# Altium PCB PCB1.PcbDoc
Units mm, origin at the board's own origin, x right, y up, seen from the top; angles counter-clockwise.
Board outline 99.5 x 96.9 mm, 2 copper layers (Top Layer, Bottom Layer); 68 components, 61 nets, 277 pads, 86 vias.
Unrouted connection lines stored in the file: 2.
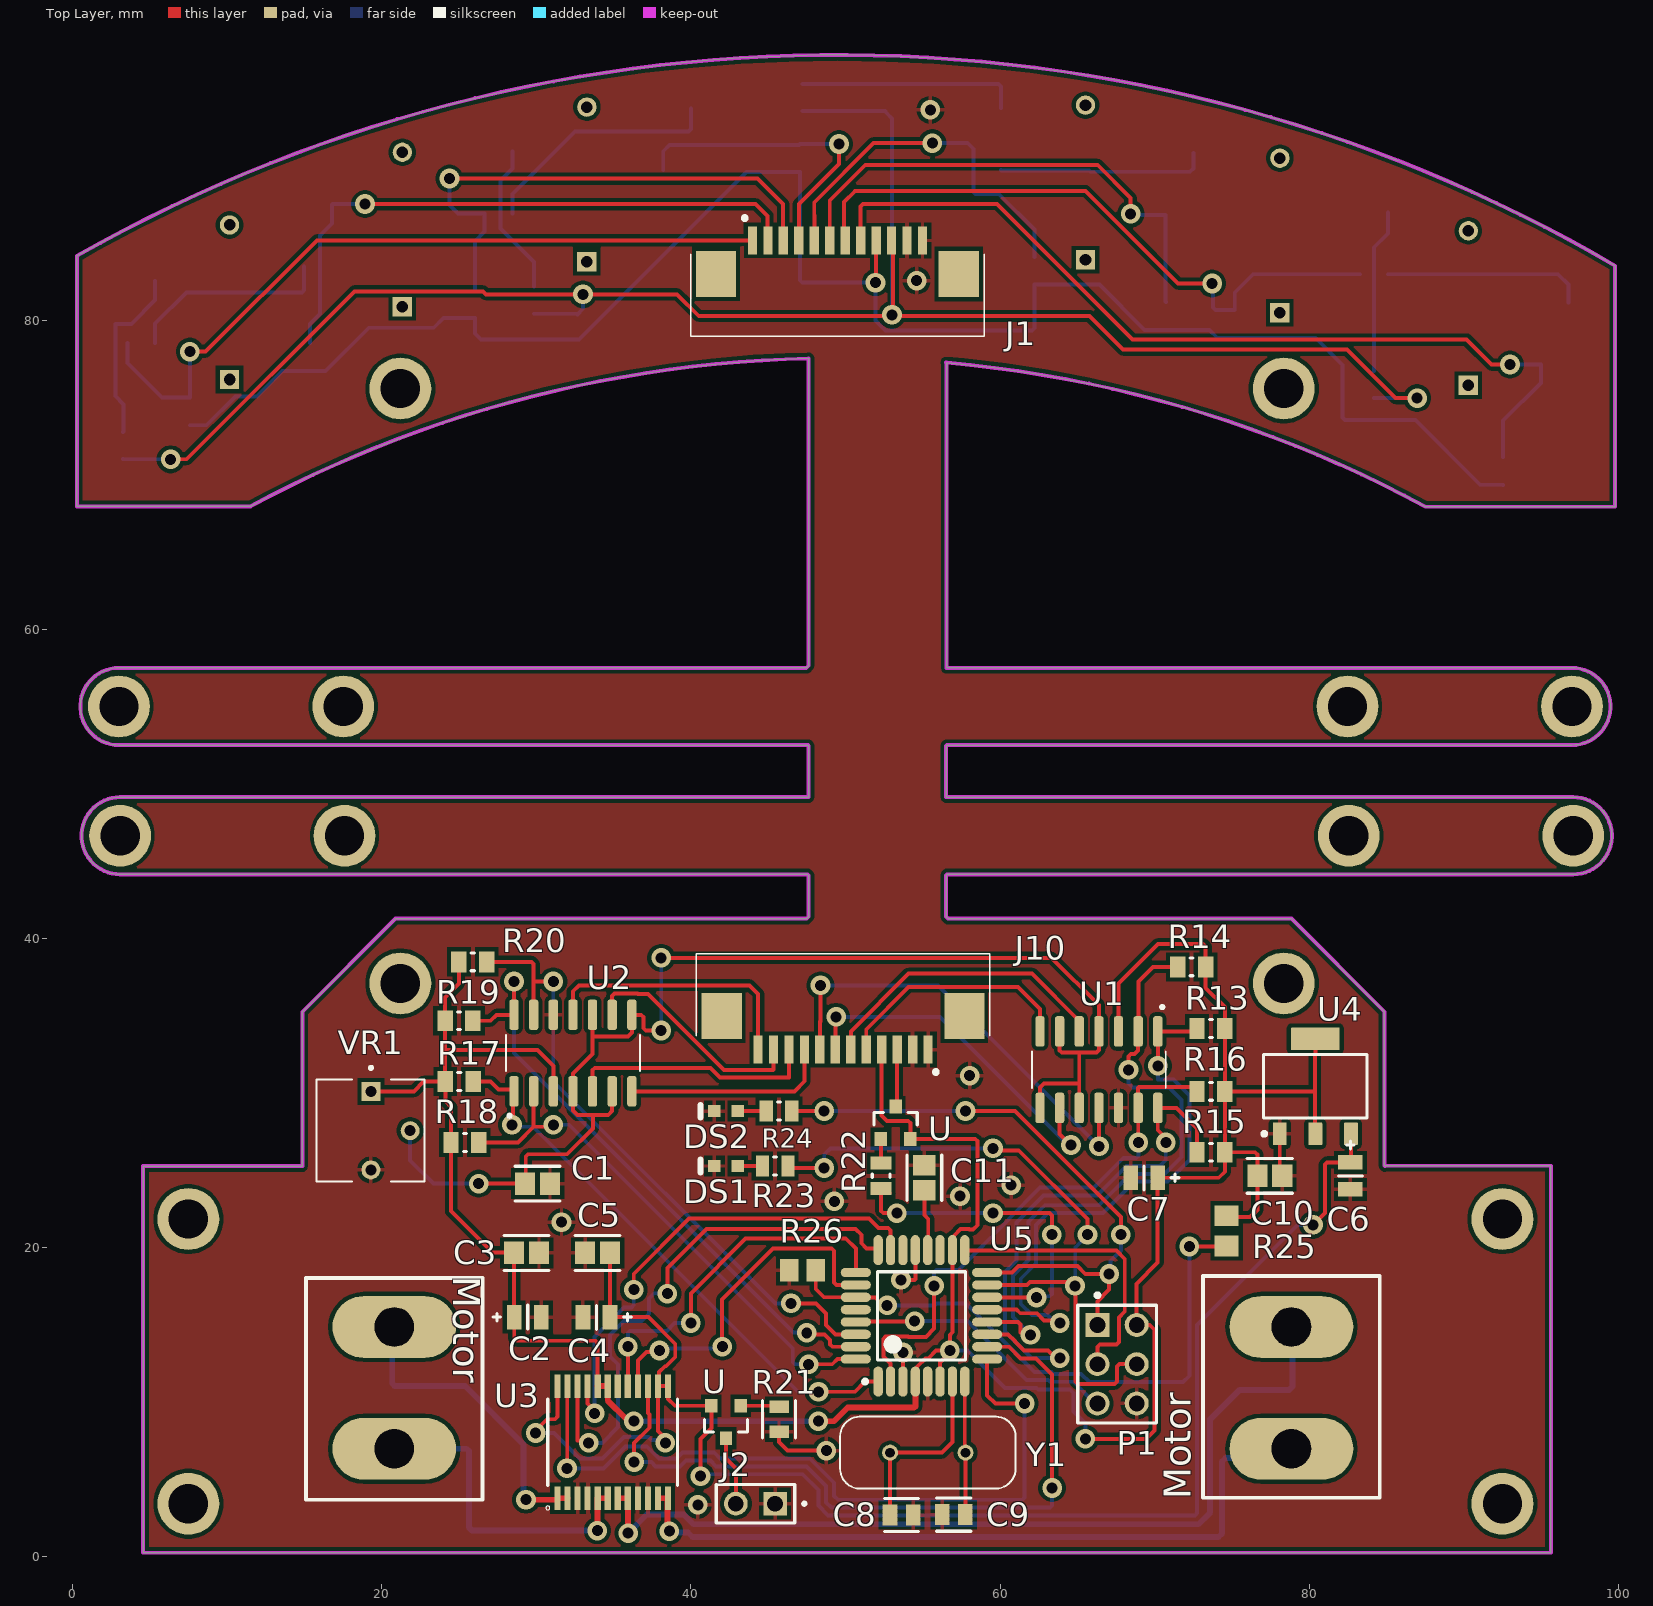
[diagram p0: Top Layer view]
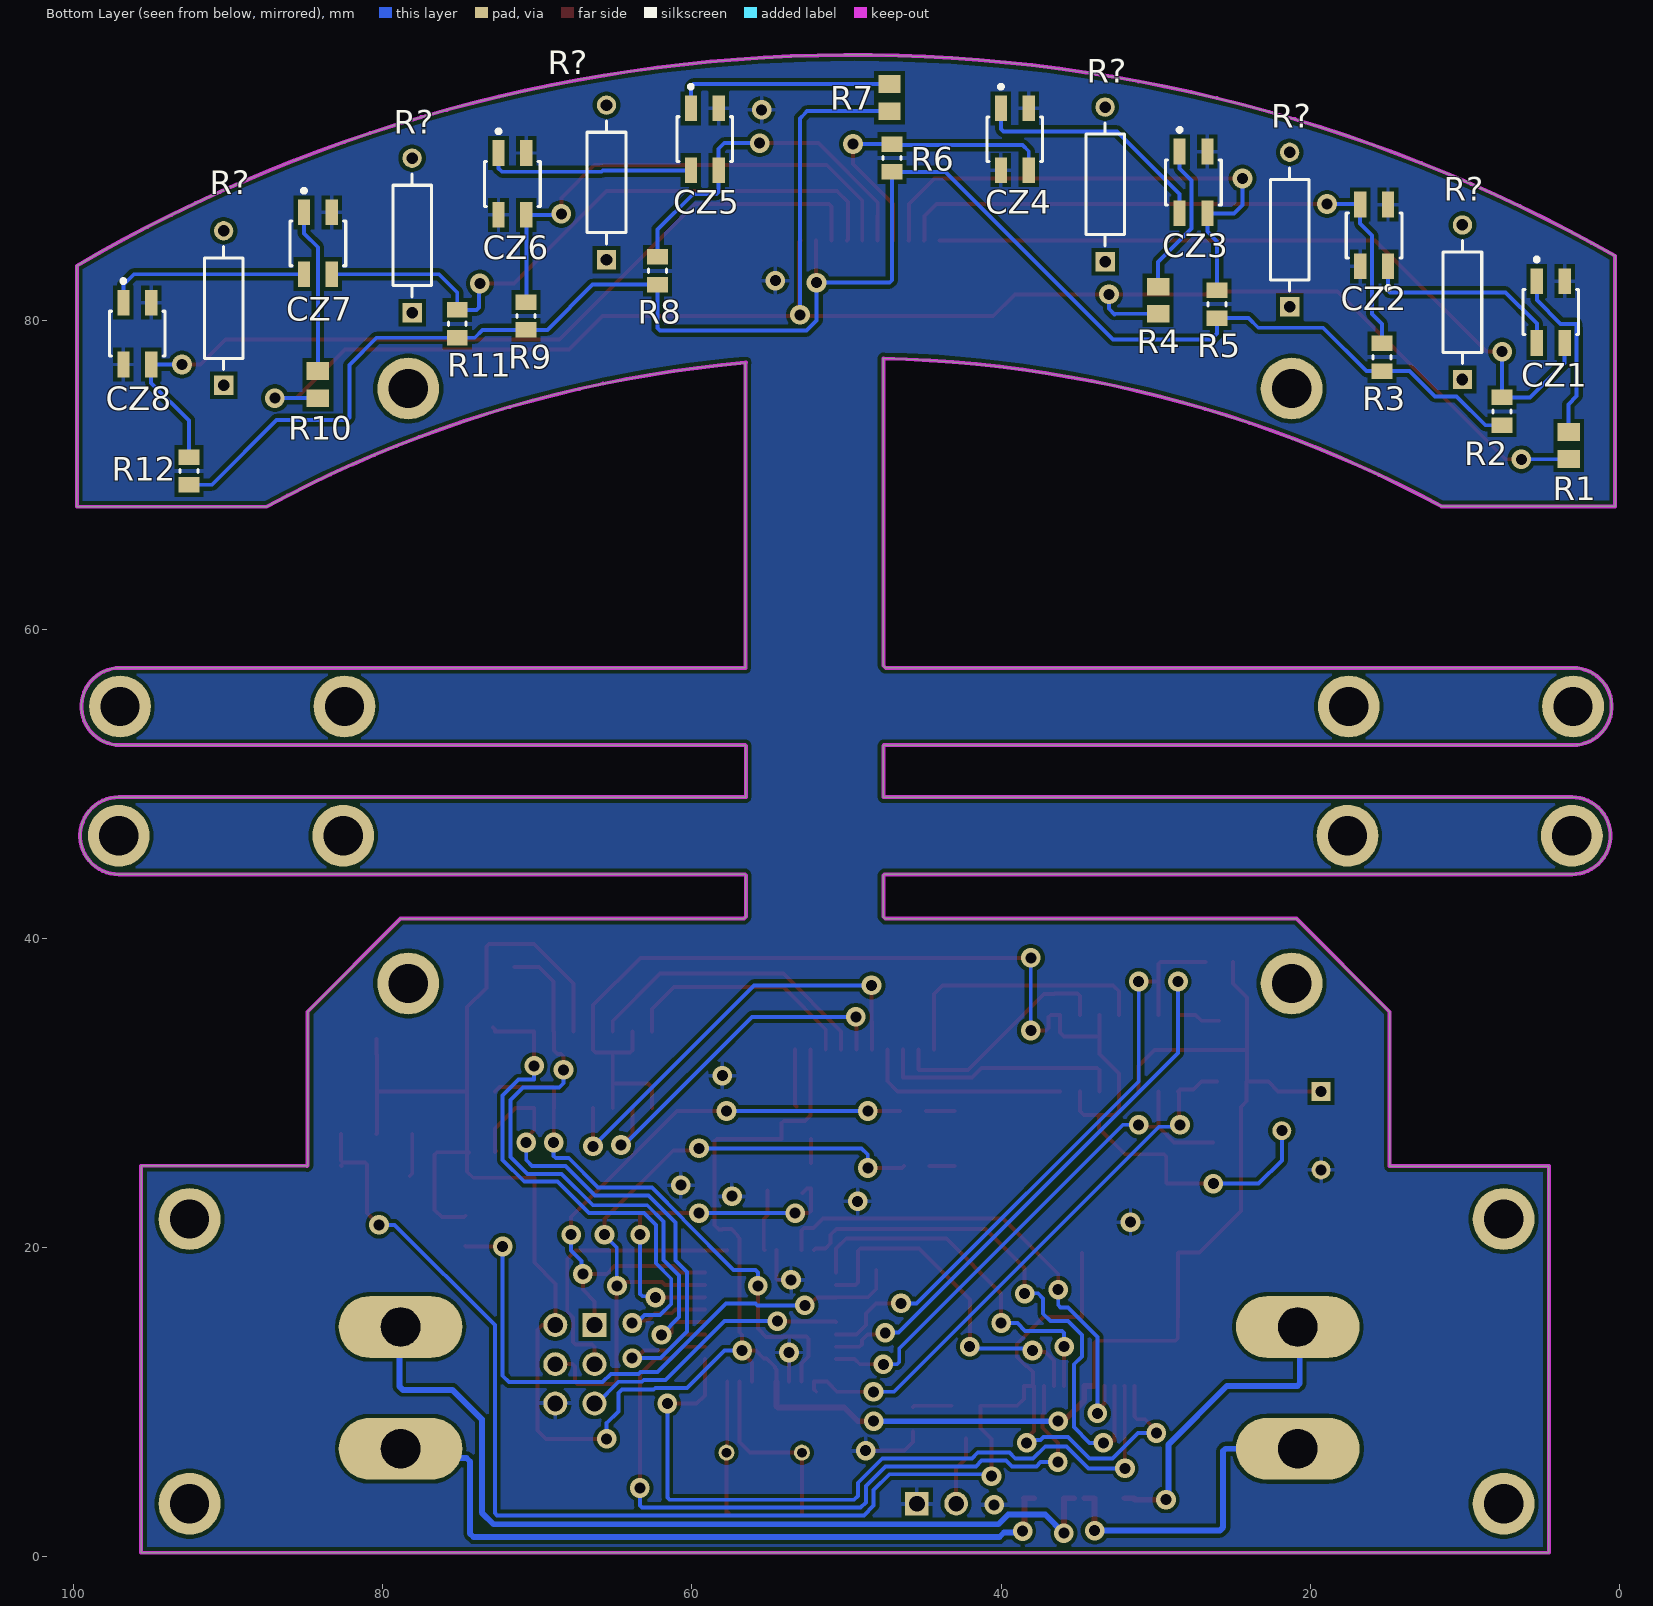
[diagram p1: Bottom Layer view, seen from below]
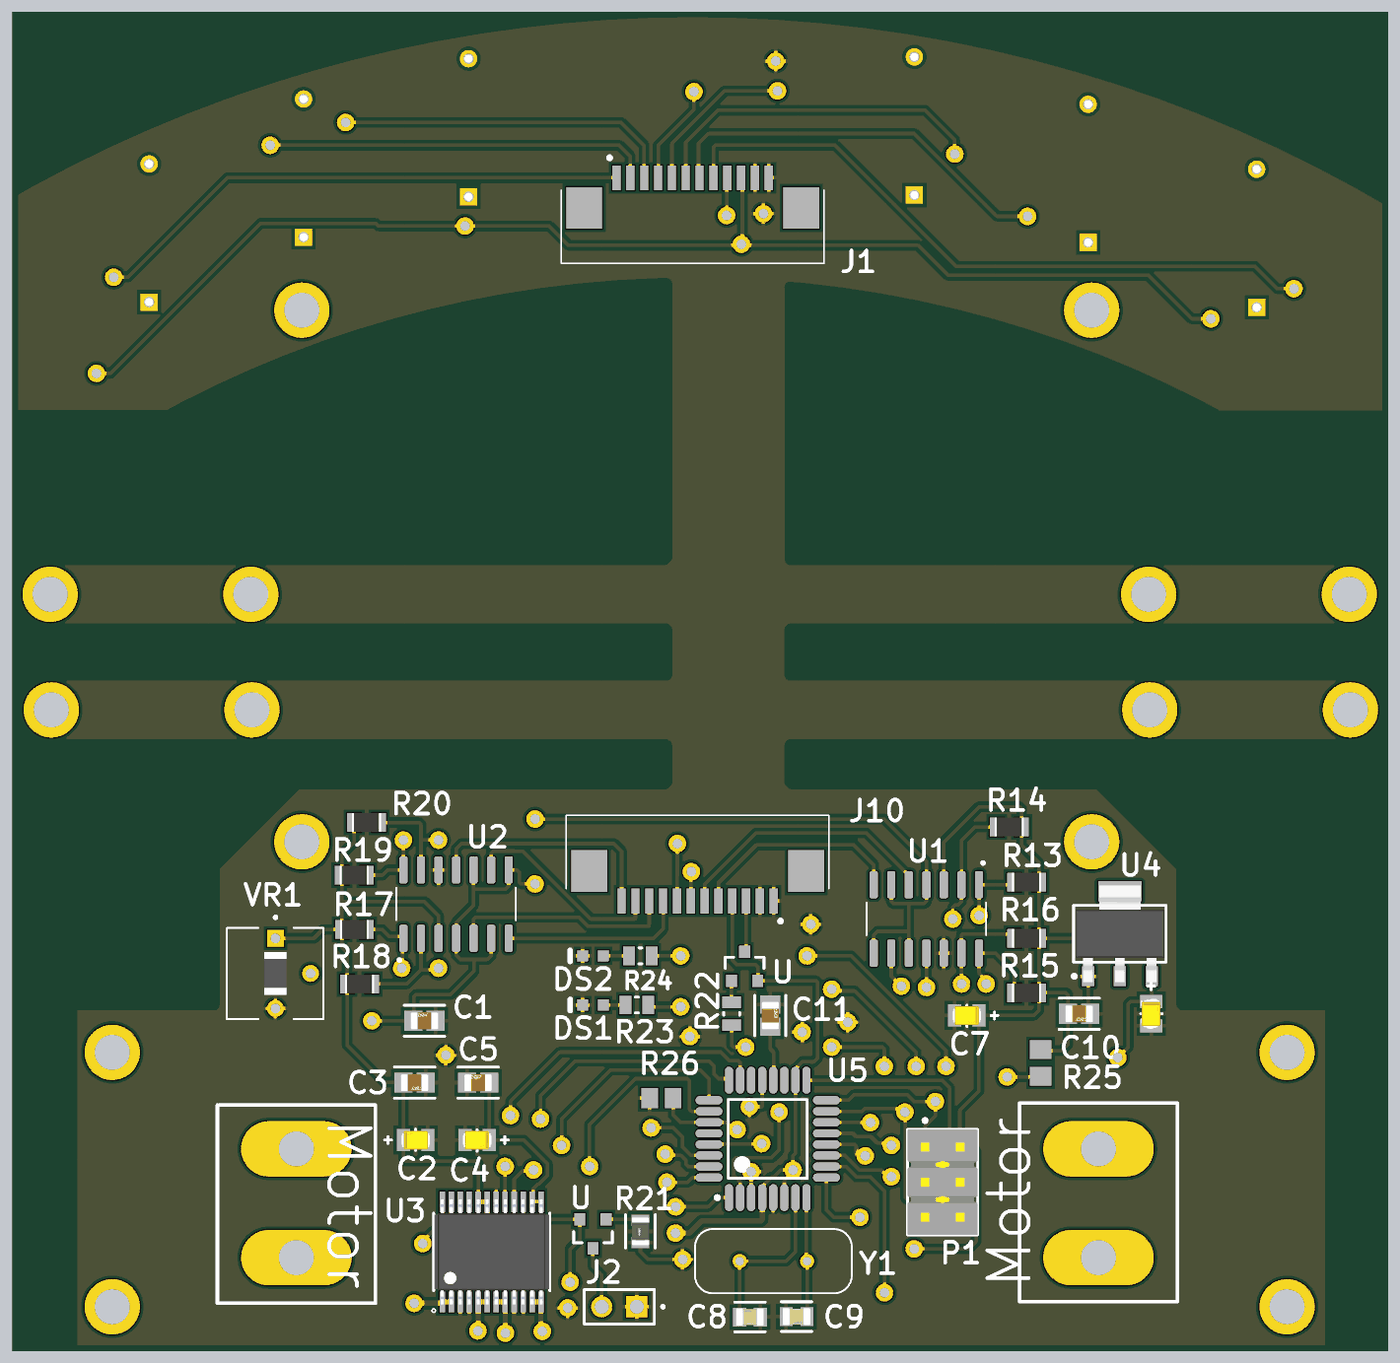
[diagram p2: 3D render of the assembled board from above, using the file's embedded part models]
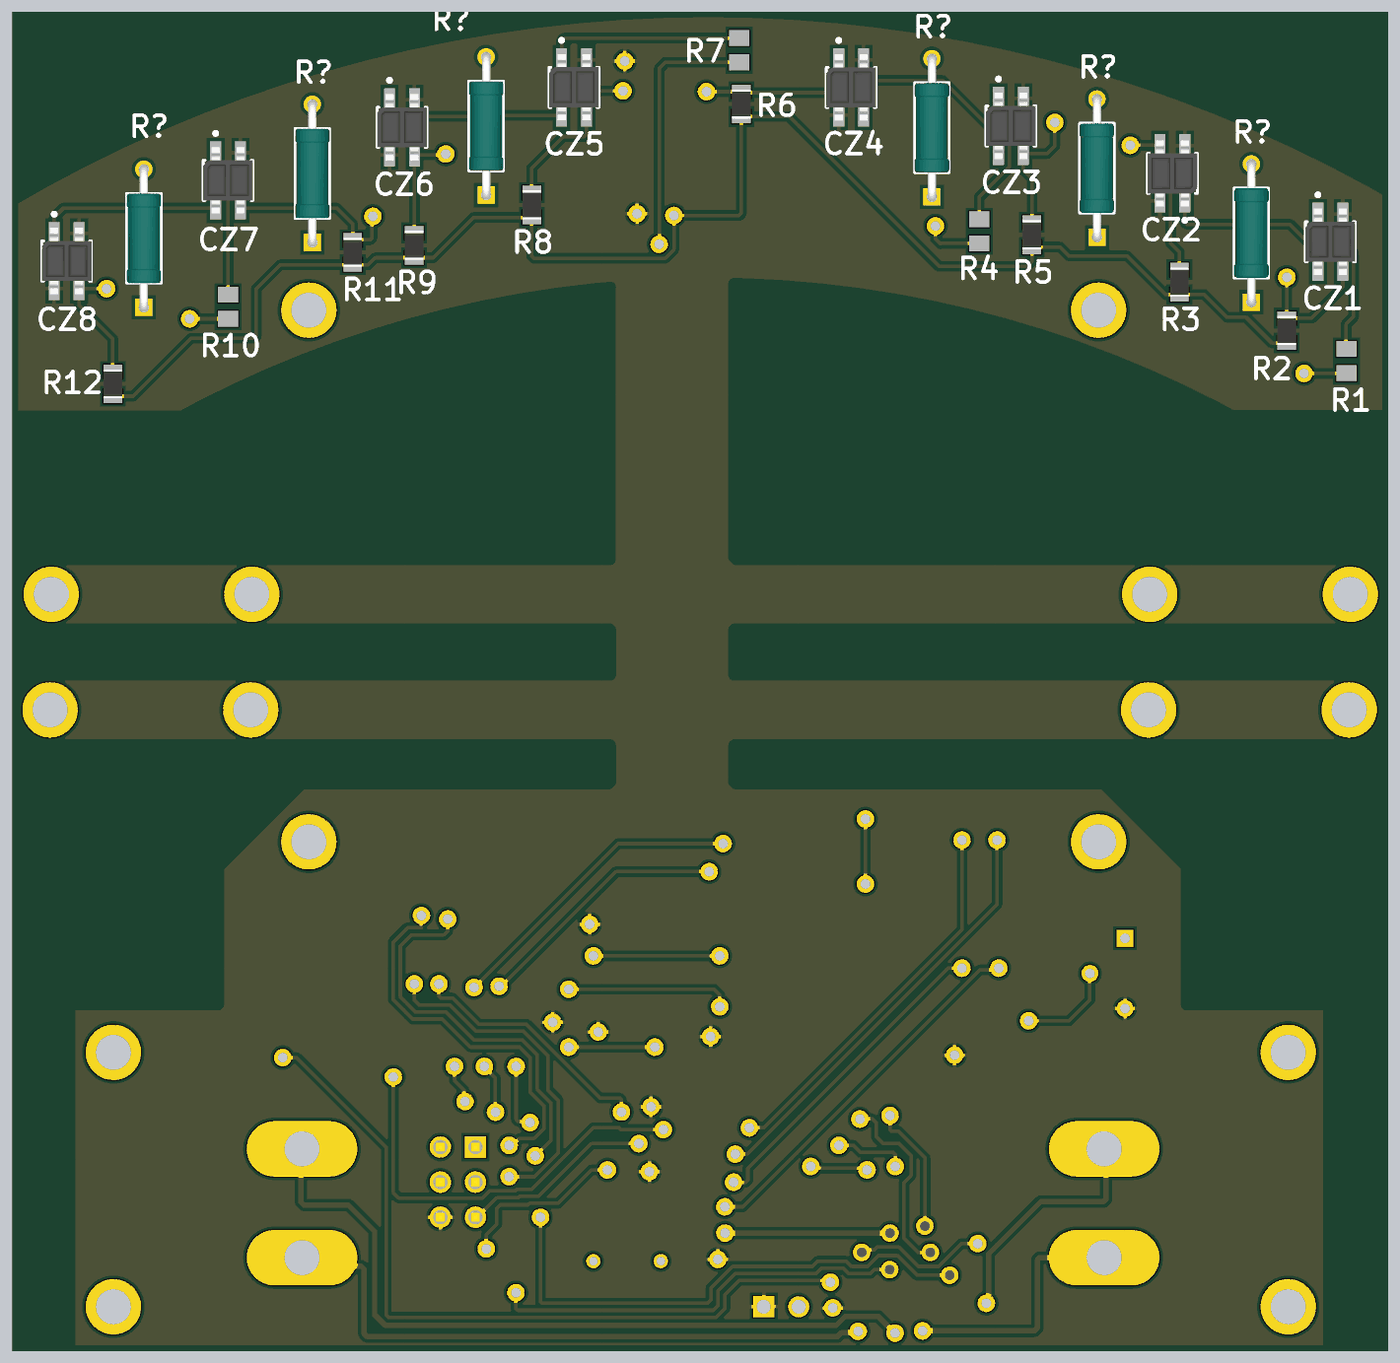
[diagram p3: 3D render of the assembled board from below, using the file's embedded part models]

## Layer stack, top to bottom
Top Solder: solder mask 0.0102, Solder Resist, Dk 3.5
Top Layer: signal copper 0.0356
Dielectric 1: dielectric 0.32, FR-4, Dk 4.8
Bottom Layer: signal copper 0.0356
Bottom Solder: solder mask 0.0102, Solder Resist, Dk 3.5

## Board outline
4.572,0.254 4.572,25.273 14.859,25.273 14.872,25.286 14.872,35.254 20.893,41.275 47.498,41.275 47.625,41.402 47.625,44.069 47.534,44.137 3.081,44.137 cw(c3.081,46.637) 3.081,49.137 47.613,49.137 47.625,49.149 47.625,52.451 47.576,52.5 3,52.5 cw(c3,55) 3,57.5 47.467,57.5 47.625,57.658 47.625,77.47 47.624,77.514 ccw(c49.486,-2.417) 11.518,67.945 0.285,67.945 0.285,84.147 cw(c49.486,-2.417) 99.79,83.511 99.79,67.92 87.538,67.92 ccw(c49.486,-2.417) 56.548,77.24 56.546,77.215 56.546,57.5 97,57.5 cw(c97,55) 97,52.5 56.564,52.5 56.515,52.451 56.515,49.149 56.527,49.137 97.081,49.137 cw(c97.081,46.637) 97.081,44.137 56.583,44.137 56.515,44.069 56.515,41.402 56.642,41.275 78.851,41.275 84.872,35.254 84.872,25.309 84.908,25.273 84.89,25.291 95.613,25.291 95.631,25.273 95.631,0.254

## Design rules (kind name [scope] priority, off if disabled: settings)
Clearance [All] p1: gap=0.254 ignorepadtopadclearanceinfootprint=FALSE except(0: Arc-Hole Track-Hole SMDPad-Hole THPad-Hole Via-Hole Fill-Hole Poly-Hole Region-Hole Text-Hole; 0.2: SMDPad-SMDPad)
HoleToHoleClearance [All] p1: gap=0.2 allowstackedmicrovias=TRUE
MinimumSolderMaskSliver [All] p1: minsoldermaskwidth=0
PolygonConnect [All] p1: connectstyle=Relief reliefconductorwidth=0.254 reliefentries=4 polygonreliefangle="90 Angle" airgapwidth=0.254
RoutingVias [All] p1: holewidth=0.711 width=1.27 viastyle="Through Hole" minholewidth=0.711 minwidth=1.27 maxholewidth=0.711 maxwidth=1.27
SilkToSilkClearance [All] p1: silktosilkclearance=0.2
SilkToSolderMaskClearance [IsPad] p1: minsilkscreentomaskgap=0.2 clearancetoexposedcopper=TRUE
SolderMaskExpansion [All] p1: expansion=0.102 istentingtop=FALSE
Width [All] p1: maxlimit=0.381 minlimit=0.254 preferedwidth=0.254
26 further rules are at their usual default settings.

## Classes and differential pairs
component class "złącze do prog": P1
component class zab.odw.polar.: J2 R21 U
component class "sterownik silników": C2 C3 C4 C5 R? U3
component class "stabilizator nap.": C6 C7 U4
component class microcontroller: C8 C9 C10 C11 DS1 DS2 R22 R23 R24 R25 R26 U U5 Y1
component class czujniki: CZ1 CZ2 CZ3 CZ4 CZ5 CZ6 CZ7 CZ8 J1 R1 R2 R3 R4 R5 R6 R7 R8 R9 R10 R11 R12 R?
component class czujniki2: C1 J10 R13 R14 R15 R16 R17 R18 R19 R20 U1 U2 VR1

## Components (designator, comment, footprint, x,y, rotation, side; value= is the part's Value field where it differs from the comment)
C1 "100n" FP-0805-L_2_01_0_2-W_1_25-IPC_B 30.084,24.13 r180 top
C2 "10u" FP-TAJP-MFG 29.449,15.494 r180 top
C3 "100n" FP-0805-L_2_01_0_2-W_1_25-IPC_B 29.372,19.654 r0 top
C4 "10u" FP-TAJP-MFG 33.894,15.494 r0 top
C5 "100n" FP-0805-L_2_01_0_2-W_1_25-IPC_B 33.966,19.654 r180 top
C6 "10u" FP-TAJP-MFG 82.662,24.638 r90 top
C7 "10u" FP-TAJP-MFG 69.327,24.511 r0 top
C8 "22n" FP-C0805C-DN-MFG 53.63,2.692 r0 top value="22,000 pF"
C9 "22n" FP-C0805C-DN-MFG 57.008,2.718 r180 top value="22,000 pF"
C10 "100n" FP-0805-L_2_01_0_2-W_1_25-IPC_B 77.455,24.638 r0 top
C11 "100n" FP-0805-L_2_01_0_2-W_1_25-IPC_B 55.103,24.511 r90 top
CZ1 "QRE1113GR" FP-100CY-MFG 4.445,80.518 r270 bottom
CZ2 "QRE1113GR" FP-100CY-MFG 15.875,85.471 r90 bottom
CZ3 "QRE1113GR" FP-100CY-MFG 27.559,88.9 r270 bottom
CZ4 "QRE1113GR" FP-100CY-MFG 39.116,91.694 r270 bottom
CZ5 "QRE1113GR" FP-100CY-MFG 59.173,91.699 r270 bottom
CZ6 "QRE1113GR" FP-100CY-MFG 71.617,88.805 r270 bottom
CZ7 "QRE1113GR" FP-100CY-MFG 84.201,84.963 r270 bottom
CZ8 "QRE1113GR" FP-100CY-MFG 95.885,79.121 r270 bottom
DS1 "HSMS-C190" AVAG-HSMX-C190_V 42.276,25.273 r180 top
DS2 "HSMG-C190" AVAG-HSMX-C190_V 42.276,28.829 r180 top
J1 "AFA07-S12FCA-00" AFA07S12FCA00 49.486,82.047 r0 top
J2 "HTSW-102-08-L-S" SAMTEC_HTSW-102-08-L-S 44.181,3.429 r0 top
J10 "AFA07-S12FCA-00" AFA07S12FCA00 49.847,35.904 r180 top
P1 "TSW-103-07-G-D" SMTC-TSW-103-07-G-D_V 67.572,12.454 r270 top
R1 "220" RESC2013X70X40NL20T20 3.277,71.882 r270 bottom
R2 "10K" RESC2013X60X35NL10T20 7.595,74.092 r270 bottom
R3 "10K" RESC2013X60X35NL10T20 15.367,77.597 r270 bottom
R4 "220" RESC2013X70X40NL20T20 29.845,81.28 r270 bottom
R5 "10K" RESC2013X60X35NL10T20 26.035,81.026 r270 bottom
R6 "10K" RESC2013X60X35NL10T20 47.066,90.486 r270 bottom
R7 "220" RESC2013X70X40NL20T20 47.223,94.386 r270 bottom
R8 "10K" RESC2013X60X35NL10T20 62.23,83.185 r270 bottom
R9 "10K" RESC2013X60X35NL10T20 70.739,80.264 r270 bottom
R10 "220" RESC2013X70X40NL20T20 84.201,75.819 r270 bottom
R11 "10K" RESC2013X60X35NL10T20 75.184,79.756 r270 bottom
R12 "10K" RESC2013X60X35NL10T20 92.541,70.232 r270 bottom
R13 "10K" RESC2013X60X35NL10T20 73.645,34.163 r0 top
R14 "10K" RESC2013X60X35NL10T20 72.397,38.154 r0 top
R15 "10K" RESC2013X60X35NL10T20 73.645,26.162 r180 top
R16 "10K" RESC2013X60X35NL10T20 73.645,30.099 r180 top
R17 "10K" RESC2013X60X35NL10T20 25.015,30.734 r180 top
R18 "10K" RESC2013X60X35NL10T20 25.385,26.797 r180 top
R19 "10K" RESC2013X60X35NL10T20 25.004,34.671 r0 top
R20 "10K" RESC2013X60X35NL10T20 25.893,38.481 r0 top
R21 "100K" FP-RC0805-0_6-IPC_C 45.705,8.89 r90 top
R22 "100" RESC2013X50X30LL20T20 52.309,24.638 r90 top
R23 "" RESC2013X50X30LL20T20 45.451,25.273 r180 top
R24 "" RESC2013X50X30LL20T20 45.705,28.829 r180 top
R25 "47K" RESC2013X70X40ML20T20 74.661,21.082 r90 top
R26 "33K" RESC2013X60X40NL20T25 47.229,18.542 r0 top
R? "MRS25000C1002FCT00" FP-MRS25-MFG 21.336,85.852 r90 bottom
R? "MRS25000C1002FCT00" FP-MRS25-MFG 33.274,88.773 r90 bottom
R? "MRS25000C1002FCT00" FP-MRS25-MFG 10.16,81.153 r90 bottom
R? "MRS25000C1002FCT00" FP-MRS25-MFG 65.532,88.9 r90 bottom
R? "MRS25000C1002FCT00" FP-MRS25-MFG 78.105,85.471 r90 bottom
R? "MRS25000C1002FCT00" FP-MRS25-MFG 90.297,80.772 r90 bottom
U "" SOT23-3 53.247,28.029 r0 top
U "" SOT23-3 42.276,8.763 r180 top
U1 "LM339D" SOIC127P600X175-14N 66.397,31.504 r270 top
U2 "LM339D" SOIC127P600X175-14N 32.372,32.579 r90 top
U3 "TB6612FNG(O,C,8,EL" SOP65P760X160-24N 34.947,7.404 r90 top
U4 "LM1117MPX-5.0/NOPB" DCY0004A_L 80.397,30.429 r90 top
U5 "ATmega328P-AU" 32A_M 54.921,15.581 r90 top
VR1 "10K" TRIM_3362P-1-103 19.304,27.559 r270 top
Y1 "16MHz" XTAL_ECS-160-20-4X 55.33,6.731 r180 top
? "Component_1" PCBComponent_1 20.813,14.859 r270 top
? "Component_1" PCBComponent_1 78.852,6.985 r90 top

## Footprints (in the part's own frame and the unit in brackets; to place one, negate y for a bottom-side part, rotate by r counter-clockwise, add the part's x,y. Pads: shape width x height; smd on the part's side, far side on the other; paste and mask are expansions set on the pad)
32A_M [mm] "Thin QFP, 32-Leads, Body 7x7mm, Pitch 0.8mm, IPC Low Density"
  oval 1.95x0.6 smd: 1(-4.25,2.8) 2(-4.25,2) 3(-4.25,1.2) 4(-4.25,0.4) 5(-4.25,-0.4) 6(-4.25,-1.2) 7(-4.25,-2) 8(-4.25,-2.8) 17(4.25,-2.8) 18(4.25,-2) 19(4.25,-1.2) 20(4.25,-0.4) 21(4.25,0.4) 22(4.25,1.2) 23(4.25,2) 24(4.25,2.8)
  oval 0.6x1.95 smd: 9(-2.8,-4.25) 10(-2,-4.25) 11(-1.2,-4.25) 12(-0.4,-4.25) 13(0.4,-4.25) 14(1.2,-4.25) 15(2,-4.25) 16(2.8,-4.25) 25(2.8,4.25) 26(2,4.25) 27(1.2,4.25) 28(0.4,4.25) 29(-0.4,4.25) 30(-1.2,4.25) 31(-2,4.25) 32(-2.8,4.25)
  silkscreen extent -4.37,-2.85 2.85,3.77, body extent -3.5,-3.5 3.5,3.5, height 1.2
AFA07S12FCA00 [mm]
  rect 0.6x1.8 smd: 1(-5.5,3.1) 2(-4.5,3.1) 3(-3.5,3.1) 4(-2.5,3.1) 5(-1.5,3.1) 6(-0.5,3.1) 7(0.5,3.1) 8(1.5,3.1) 9(2.5,3.1) 10(3.5,3.1) 11(4.5,3.1) 12(5.5,3.1)
  rect 2.6x3 smd: MP1(-7.85,0.93) MP2(7.85,0.93)
  silkscreen extent -9.5,-3.1 9.5,4.6
AVAG-HSMX-C190_V [mm] "SMD, 2-Leads, Body 1.6x0.8mm, Height 0.9mm"
  rect 0.8x0.8 smd: 1(-0.75,0) 2(0.75,0)
  silkscreen extent 1.65,-0.4 1.65,0.4, body extent -0.8,-0.4 0.8,0.4, height 0.9
DCY0004A_L [mm] "SOT223, 4-Leads, Body 6.7x3.7mm, Pitch 2.3mm, IPC High Density"
  rrect11% 1.45x0.9 smd: 1(-3.075,2.3) 2(-3.075,0) 3(-3.075,-2.3)
  rrect7% 1.45x3.15 smd: 4(3.075,0)
  silkscreen extent -3.2,-3.35 2.05,3.42, body extent -3.5,-3.25 3.5,3.25, height 1.62
FP-100CY-MFG [mm]
  rect 1.66x0.79 smd paste+0 mask+0: 1(-2,-0.9) 2(2,-0.9) 3(2,0.9) 4(-2,0.9)
  silkscreen extent -3.52,-1.8 1.45,1.8, body extent -2.4,-1.8 2.4,1.8, height 1.85
FP-0805-L_2_01_0_2-W_1_25-IPC_B [mm]
  rect 1.305x1.456 smd paste+0 mask+0: 1(-0.806,0) 2(0.806,0)
  silkscreen extent -1.46,-1.13 1.46,1.13, body extent -1.71,-0.98 1.71,0.98, height 0.25
FP-C0805C-DN-MFG [mm]
  rect 0.95x1.35 smd paste+0 mask+0: 1(-0.75,0) 2(0.75,0)
  silkscreen extent -1.1,-1.07 1.1,1.07, body extent -1,-0.63 1,0.63, height 0.88
FP-MRS25-MFG [mm]
  rect 1.25x1.25 hole 0.75 paste-2539.97 mask+0: 1(-5,0)
  round 1.25 hole 0.75 paste-2539.97 mask+0: 2(5,0)
  silkscreen extent -3.98,-1.25 3.98,1.25, body extent -5.3,-1.25 5.3,1.25, height 2.5
FP-RC0805-0_6-IPC_C [mm]
  rect 0.808x1.262 smd paste+0 mask+0: 1(-0.802,0) 2(0.802,0)
  silkscreen extent -1.21,-1.07 1.21,1.07, body extent -1.31,-0.77 1.31,0.77, height 0.25
FP-TAJP-MFG [mm]
  rect 0.95x1.6 smd paste+0 mask+0: 1(-0.875,0) 2(0.875,0)
  silkscreen extent 0,-0.8 2.25,0.75, body extent -1.45,-0.9 1.45,0.9, height 0.25
PCBComponent_1 [mm]
  oval 4x8 hole 2.54: 1(0,0) 2(7.874,0)
  silkscreen extent -3.18,-5.72 11.18,5.72
RESC2013X50X30LL20T20 [mm] "Chip Resistor, 2-Leads, Body 2.00x1.25mm, IPC High Density"
  rect 0.85x1.35 smd: 1(-0.825,0) 2(0.825,0)
  silkscreen extent -0.1,-0.58 0.1,0.58, body extent -1.1,-0.72 1.1,0.72, height 0.5
RESC2013X60X35NL10T20 [mm] "Chip Resistor, 2-Leads, Body 2.1x1.35mm, IPC Medium Density"
  rect 1x1.35 smd: 1(-0.9,0) 2(0.9,0)
  silkscreen extent -0.1,-0.57 0.1,0.58, body extent -1.05,-0.68 1.05,0.67, height 0.6
RESC2013X60X40NL20T25 [mm] "Chip Resistor, 2-Leads, Body 2.00x1.25mm, IPC Medium Density"
  rect 1.2x1.45 smd: 1(-0.85,0) 2(0.85,0)
  body extent -1.1,-0.72 1.1,0.72, height 0.6
RESC2013X70X40ML20T20 [mm] "Chip Resistor, 2-Leads, Body 2.00x1.25mm, IPC Low Density"
  rect 1.35x1.55 smd: 1(-0.975,0) 2(0.975,0)
  body extent -1.1,-0.72 1.1,0.72, height 0.7
RESC2013X70X40NL20T20 [mm] "Chip Resistor, 2-Leads, Body 2.00x1.25mm, IPC Medium Density"
  rect 1.15x1.45 smd: 1(-0.875,0) 2(0.875,0)
  body extent -1.1,-0.72 1.1,0.72, height 0.7
SAMTEC_HTSW-102-08-L-S [mm]
  rect 1.53x1.53 / inner round 1.53 / far side rect 1.53x1.53 hole 1.02: 01(1.27,0)
  round 1.53 hole 1.02: 02(-1.27,0)
  silkscreen extent -2.54,-1.24 3.26,1.24
SMTC-TSW-103-07-G-D_V [mm] "THD, 6-Leads, Body 7.62x5.08mm, Pitch 2.54mm"
  rect 1.55x1.55 hole 1.02: 1(-2.54,-1.27)
  round 1.55 hole 1.02: 2(-2.54,1.27) 3(0,-1.27) 4(0,1.27) 5(2.54,-1.27) 6(2.54,1.27)
  silkscreen extent -4.58,-2.54 3.81,2.54, body extent -3.81,-2.54 3.81,2.54, height 8.38
SOIC127P600X175-14N [mm]
  rrect50% 1.97x0.6 smd: 1(-2.475,3.81) 2(-2.475,2.54) 3(-2.475,1.27) 4(-2.475,0) 5(-2.475,-1.27) 6(-2.475,-2.54) 7(-2.475,-3.81) 8(2.475,-3.81) 9(2.475,-2.54) 10(2.475,-1.27) 11(2.475,0) 12(2.475,1.27) 13(2.475,2.54) 14(2.475,3.81)
  silkscreen extent -4.15,-4.33 1.17,4.33
SOP65P760X160-24N [mm]
  rect 1.5x0.4 smd: 1(-3.625,3.575) 2(-3.625,2.925) 3(-3.625,2.275) 4(-3.625,1.625) 5(-3.625,0.975) 6(-3.625,0.325) 7(-3.625,-0.325) 8(-3.625,-0.975) 9(-3.625,-1.625) 10(-3.625,-2.275) 11(-3.625,-2.925) 12(-3.625,-3.575) 13(3.625,-3.575) 14(3.625,-2.925) 15(3.625,-2.275) 16(3.625,-1.625) 17(3.625,-0.975) 18(3.625,-0.325) 19(3.625,0.325) 20(3.625,0.975) 21(3.625,1.625) 22(3.625,2.275) 23(3.625,2.925) 24(3.625,3.575)
  silkscreen extent -4.38,-4.2 2.8,4.33, body extent -3.8,-4.15 3.8,4.15, height 1.6
SOT23-3 [mm]
  rect 0.8x0.9 smd: 1(-0.95,-1) 2(0.95,-1) 3(0,1.1)
  silkscreen extent -1.4,-0.1 1.4,0.7
TRIM_3362P-1-103 [mm]
  rect 1.222x1.222 hole 0.714: 1(-2.54,0)
  round 1.222 hole 0.714: 2(0,2.54) 3(2.54,0)
  silkscreen extent -4.16,-3.53 3.3,3.47, body extent -1.55,-0.8 1.55,0.8, height 0.65
XTAL_ECS-160-20-4X [mm]
  round 1.03 hole 0.63: 1(-2.44,0) 2(2.44,0)
  silkscreen extent -5.68,-2.33 5.68,2.33

## Part data
C1 C3 C5 C10 C11: library part CMP-2007-04174-2, "General Purpose Ceramic Capacitor, 0805, 100nF, 10%, X7R, 15%, 100V", Capacitance=100nF, Case Code (Imperial)=0805, Case Code (Metric)=2012, Dielectric=X7R, Dielectric Material=Ceramic, Max Operating Temperature=125°C, Min Operating Temperature=-55°C, Package Quantity=2000, Tolerance=10%, Voltage=100V, Case/Package=0805, Construction=Flat, Contact Plating=Tin, Depth=1.25mm, Height=1.4mm, Lead Free="Lead Free", Length=2.01mm, Mount="Surface Mount", Number of Pins=2, Packaging="Tape and Reel", Radiation Hardening=No, REACH SVHC="No SVHC", RoHS Compliant=Yes, Series=-, Termination=SMD/SMT, Thickness=0.055inch, Voltage Rating=100V, Voltage Rating (DC)=100V, Width=0.049inch
C2 C4 C6 C7: library part CMP-2007-04028-2, "10uF 10V  ±20% 6Ω 0805  SMD Tantalum Capacitor", Capacitance=10uF, Case Code (Imperial)=0805, Case Code (Metric)=2012, Dielectric Material=Tantalum, ESR (Equivalent Series Resistance)=6R, Leakage Current=1uA, Max Operating Temperature=125°C, Min Operating Temperature=-55°C, Package Quantity=1, Tolerance=20%, Voltage=10V, Case/Package=0805, Depth=1.35mm, Dissipation Factor=8%, Features="General Purpose", Height=1.5mm, Height - Seated (Max)=0.059inch, Lead Free="Lead Free", Length=2.05mm, Mount="Surface Mount", Number of Pins=2, Packaging="Tape and Reel", Polarity=Polar, REACH SVHC="No SVHC", RoHS Compliant=Yes, Series=TAJ, Termination=SMD/SMT, Voltage Rating=10V, Voltage Rating (DC)=10V, Width=0.053inch
C8 C9: library part CMP-2007-00338-2, "CAP CER 0.022UF 50V X7R 0805", Capacitance="22,000 pF", Manufacturer=KEMET, Manufacturer Part Number=C0805C223K5RACTU, Package=C0805C-DN, Temperature="-55°C to +125°C", Temperature Characteristic=X7R, Temperature Coefficient=30ppm/°C, Temperature Range High=+125°C, Temperature Range Low=-55°C, Tolerance=0.1, Voltage Rating="50 V", Automotive=No, Category=Cap, ComponentLink2Description=Datasheet, ComponentLink2URL=https://content.kemet.com/datasheets/KEM_C1003_C0G_SMD.pdf, Device Class L1="Passive Components", Device Class L2=Capacitors, Device Class L3="Ceramic Capacitors", Digikey Description="CAP CER 0.022UF 50V X7R 0805", Height=0.88mm, Ipc Land Pattern Name=CAPC200125X78, Lead Free=Yes, Material=Ceramic, Mouser Description="Capacitor; Ceramic; Cap; .022uF; Tol 10%; SMT; Vol-Rtg 50V; X7R; Tape and Reel", Octopart=https://octopart.com/c0805c223k5ractu-kemet-145968, RoHS=TRUE
CZ1 CZ2 CZ3 CZ4 CZ5 CZ6 CZ7 CZ8: library part CMP-2000-06919-2, "SENSOR OPTO TRANS REFL SMD PHOTO", Case/Package=SMD/SMT, Collector Emitter Breakdown Voltage=30V, Forward Current=50mA, Forward Voltage=1.2V, Max Collector Current=20mA, Max Operating Temperature=85°C, Max Power Dissipation=75mW, Min Operating Temperature=-40°C, Operating Supply Voltage=1.7V, Package Quantity=1000, Reverse Breakdown Voltage=5V, Collector Emitter Voltage (VCEO)=30V, Contact Plating=Tin, Fall Time=20us, Height=1.7mm, Input Current=50mA, Lead Free="Lead Free", Length=3.6mm, Max Breakdown Voltage=30V, Mount="Surface Mount", Number of Channels=1, Number of Elements=1, Number of Pins=4, Output Type=Phototransistor, Packaging="Tape and Reel", Power Dissipation=75mW, Radiation Hardening=No, REACH SVHC="No SVHC", Response Time=20us, Reverse Voltage (DC)=5V, Rise Time=20us, Sensing Distance=0.197inch, Wavelength=940nm, Weight=0.078g, Width=2.9mm
DS1: library part CMP-2000-06427-1, "LED Uni-Color Red, 52 mW, 20 mA, -40 to 85 degC, 2-Pin SMD, RoHS, Tape and Reel", Emitting Color=Red, Forward Current=25mA, Forward Voltage=2.6V, Manufacturer=Avago, Operating Temp Range=-40Cto85C, Operating Temperature Classification=Industrial, Package Description="2-Pin Surface Mount Device, Body 1.6 x 0.8 mm, Height 0.9 mm", Package Reference=HSMX-C190, Package Type=ChipLed, Power Dissipation=52W, Reverse Voltage=5V, Test Current (It)=20mA, Chip Material=GaP, Datasheet URL=http://docs.avagotech.com/docs/AV02-0551EN, Datasheet Version=03/2012, DELETED=Compliant, Dominant Wave Length=626nm, High Brightness=No, Lens Dimensions=1x0.8x0.5mm, Lens Type=ColorlessDiffused, Lum Intensity=10mcd, Luminous Intensity=10mcd, Main Category=ChipLED, Manufacturer URL=http://www.avagotech.com/, Mounting=SurfaceMount, Mounting Technology=SurfaceMount, Number of  Elements=1, Packaging=TapeandReel, Peak Wavelength=630nm, Pin Count=2, Product Depth (mm)=0.8mm, Product Height (mm)=0.8mm, Product Length (mm)=1.6mm, Rad Hardened=No, Shape Type=Rectangular, Type=Uni-Color, Viewing Angle=170deg
DS2: library part CMP-1744-00002-1, "Chip LED, Green, 2.2 V, -40 to 85 degC, 2-Pin SMD, RoHS, Tape and Reel", Case\Package=SOIC, Clock Frequency="100 KHz", Frequency="400 KHz", Max Operating Temperature="85 degC", Max Supply Voltage="5.5 V", Min Operating Temperature="-40 degC", Min Supply Voltage="1.7 V", Nominal Supply Current="2 mA", Package Quantity=3000, Access Time="3500 ns", ComponentLink1Description="Manufacturer URL", ComponentLink1URL=http://www.avagotech.com/, ComponentLink2Description=Datasheet, ComponentLink2URL=http://docs.avagotech.com/docs/AV02-0551EN, ComponentLink3Description="Package Specification", ComponentLink3URL=http://www.fairchildsemi.com/dwg/MA/MA03D.pdf, DatasheetVersion=Mar-12, Density="32 kb", Height="1.5 mm", Interface=Serial, Length="5 mm", Max Clock Frequency="100 KHz", Mount="Surface Mount", PackageDescription="2-Pin Surface Mount Device, Body 1.6 x 0.8 mm, Height 0.9 mm", PackageReference=HSMX-C190, Packaging="Tape and Reel", Pins=8, Radiation Hardening=No, REACH SVHC="No SVHC", RoHSCompliant=true, Width="4 mm"
J1 J10: "FFC, FPC Connectors P=1mm RoHS", Manufacturer_Name=JUSHUO, Datasheet Link=https://datasheet.lcsc.com/szlcsc/JUSHUO-AFA07-S12FCA-00_C262718.pdf, Geometry.Height=2.6mm, Manufacturer_Part_Number=AFA07-S12FCA-00
J2: "Conn Unshrouded Header HDR 2 POS 2.54mm Solder ST Top Entry Thru-Hole Bag", Package=None, Availability="In Stock", Check_prices=https://www.snapeda.com/parts/HTSW-102-08-L-S/Samtec/view-part/?ref=eda, MF="Samtec Inc.", MP=HTSW-102-08-L-S, Price=None, Purchase-URL=https://pricing.snapeda.com/search/part/HTSW-102-08-L-S/?ref=eda, SnapEDA_Link=https://www.snapeda.com/parts/HTSW-102-08-L-S/Samtec/view-part/?ref=snap
P1: library part CMP-2000-07329-1, "Through Hole Header, Pitch 2.54 mm, 2 x 3 Position, Height 8.58 mm, Tail Length 2.54 mm, -55 to 125 degC, RoHS, Bulk", Color=Black, Manufacturer=Samtec-Inc., Package Description="Through Hole Header, Pitch 2.54 mm, 2 x 3 Position, Height 8.58 mm, Tail Length 2.54 mm", Category=Connectors,Interconnects, Connector Type=Header,Unshrouded, Contact Finish=Gold, Contact Finish Thickness=10µin(0.25µm), Contact Mating Length="0.230\"(5.84mm)", Contact Type=MalePin, Datasheet URL=http://suddendocs.samtec.com/catalog_english/tsw_th.pdf, Datasheet Version=12/2015, Family=RectangularConnectors-Headers,MalePins, Fastening Type=-, Features=-, Manufacturer URL=http://www.samtec.com/, Mounting Technology=ThroughHole, Mounting Type=ThroughHole, Number of Positions=6, Number of Positions Loaded=All, Number of Rows=2, Package Reference=TSW-103-07-G-D, Package URL=http://suddendocs.samtec.com/prints/tsw-xxx-xx-xxx-x-xx-xxx-mkt.pdf, Packaging=Bulk, Pitch="0.100\"(2.54mm)", Row Spacing="0.100\"(2.54mm)", Series=TSW, Termination=Solder
R1 R4 R7 R10: library part CMP-2001-00044-1, Manufacturer=Panasonic, Part Number=ERJ6ENF2200V
R2 R3 R5 R6 R8 R9 R11 R12 R13 R14 R15 R16 R17 R18 R19 R20: library part CMP-1659-00013-4, "Chip Resistor, 10 KOhm, +/- 1%, 0.125 W, -55 to 155 degC, 0805 (2012 Metric), RoHS, Tape and Reel", Manufacturer=Yageo, Max Operating Temperature="155 degC", Min Operating Temperature="-55 degC", Package Quantity=5000, Voltage Rating="150 V", ComponentLink1Description="Manufacturer URL", ComponentLink1URL=http://www.yageo.com/, ComponentLink2Description=Datasheet, ComponentLink2URL=http://www.yageo.com/documents/recent/PYu-RC_Group_51_RoHS_L_04.pdf, DatasheetVersion="Rev. 4, 02/2016", Height="0.5 mm", Length="2 mm", Mount="Surface Mount", Mounting Technology="Surface Mount", PackageDescription="2-Pin Surface Mounted Device, Body 2 x 1.25 mm", PackageReference=0805, Packaging="Tape and Reel", Pins=2, REACH SVHC="No SVHC", RoHSCompliant=true
R21: library part CMP-2100-03668-5, "RES 100K OHM 1% 1/8W 0805", Case Code (Imperial)=0805, Case Code (Metric)=2012, Max Operating Temperature=155°C, Max Power Dissipation=125mW, Min Operating Temperature=-55°C, Package Quantity=1, Resistance=100kR, Resistance Tolerance=1%, Resistor Type="Thick Film", Temperature Coefficient=100ppm/°C, Voltage Rating=150V, Case/Package=0805, Construction=Rectangular, Depth=1.25mm, Features="Moisture Resistant", Height=0.024inch, Lead Free="Lead Free", Lead Pitch=0.4mm, Length=0.079inch, Military Standard=Not, Number of Pins=2, Number of Terminations=2, Packaging="Tape and Reel", Power Rating=125mW, RoHS Compliant=Yes, Series=RC, Size Code=0805, Technology="THICK FILM", Termination=SMD/SMT, Tolerance=1%, Voltage Rating (DC)=150V, Width=0.049inch
R22: library part CMP-2001-04901-1, Manufacturer="Vishay Dale", Part Number=CRCW0805100RFKEA
R23 R24: library part CMP-2001-03932-1, Manufacturer="Vishay Dale", Part Number=CRCW0805470RFKEA
R25: library part CMP-2001-00551-1, Manufacturer=Panasonic, Part Number=ERJ6ENF4702V
R26: library part CMP-2001-00630-1, Manufacturer=Panasonic, Part Number=ERA6AEB333V
R? R? R? R? R? R?: library part CMP-00030-42632392-1, "MRS25000C1002FCT00 Resistor, 10 kOhm, ± 1%, 600 mW, Axial Leaded, Metal Film (Thin Film), Professional", Case/Package=Conformal, Max Operating Temperature=155°C, Max Power Dissipation=600mW, Min Operating Temperature=-55°C, Resistance=10kΩ, Temperature Coefficient=50ppm/°C, Tolerance=1%, Voltage Rating=350V, Composition="Metal Film, Thin Film", Contact Plating=Tin, Diameter=2.5mm, Lead Free="Lead Free", Lead Length=26mm, Length=6.5mm, Military Standard=Not, Mount="Through Hole", NexarPartId=42632392, Number of Pins=2, Number of Terminations=2, Power Rating=600mW, Radiation Hardening=No, REACH SVHC=Unknown, RoHS=Compliant, Schedule B="8533210090, 8533210090", Termination=Axial, Voltage Rating (DC)=350V, Width=2.5mm
U U: library part AO3401, "P-Channel 30V 4A (Ta) 1.4W (Ta) Surface Mount SOT-23-3L", Package="SOT-23-3 Alpha &amp; Omega Semiconductor", Arrow_Electronics-Purchase-URL=https://snapeda.com/shop?store=Arrow+Electronics&id=4795619, Availability=Warning, MF="Alpha & Omega Semiconductor", MP=AO3401, Price=None, SnapEDA_Link=https://www.snapeda.com/parts/AO3401/Alpha%20&%20Omega%20Semiconductor/view-part/4795619/?ref=snap
U1 U2: Package=None, Availability=Unavailable, MP=LM339D, Price=None
U3: "DC Motor Driver 3V 24-Pin SSOP T/R", Package="SSOP-24 Toshiba", Availability="Not in stock", Check_prices=https://www.snapeda.com/parts/TB6612FNG(O,C,8,EL/Toshiba/view-part/?ref=eda, MF=Toshiba, MP=TB6612FNG(O,C,8,EL, Price=None, SnapEDA_Link=https://www.snapeda.com/parts/TB6612FNG(O,C,8,EL/Toshiba/view-part/?ref=snap
U4: library part CMP-0062-01635-4, "800mA Low-Dropout Linear Regulator, 4-pin SOT-223, Pb-Free", Manufacturer="Texas Instruments", PackageTopMarking=XYTT*N06A, PowerWise=N, Code_IPC=SOT223-4, Code_JEDEC=TO-261-AA, ComponentLink1Description="Datasheet URL", ComponentLink1URL=http://www.ti.com/general/docs/lit/getliterature.tsp?genericPartNumber=LM1117-N&fileType=pdf, CompType="LDO IC", High-Reliability=Y, PackageDescription="Molded SOT-223, 6.50 x 3.56 x 1.6mm Body, 4 Lead, 2.3mm Pitch", PackageReference=DCY0004A, PartNumber=LM1117MPX-5.0/NOPB, PinCount=4, RoHS=Y
U5: library part CMP-0095-00269-2, "8-bit AVR Microcontroller, 32KB Flash, 1KB EEPROM, 2KB SRAM, 32-pin TQFP, Industrial Grade (-40°C to 85°C)", Code_JEDEC=MS-026-ABA, ComponentLink1Description="Manufacturer URL", ComponentLink1URL=http://www.atmel.com/, ComponentLink2Description="ATmega48A/48PA/88A/88PA/168A/168PA/328/328P Datasheet", ComponentLink2URL=http://www.atmel.com/dyn/resources/prod_documents/doc8271.pdf, ComponentLink3Description="ATmega48A/48PA/88A/88PA/168A/168PA/328/328P Summary", ComponentLink3URL=http://www.atmel.com/dyn/resources/prod_documents/8271S.pdf, DatasheetVersion="revD, May-2011", PackageDescription="32-Lead, 7x7x1.0 mm Body, 0.8mm Lead Pitch, Thin Profile Plastic Quad Flat Package (TQFP)", PackageReference=32A, PackageVersion="revC, Oct-2010", RevisionNote="DatasheetVersion & PackageVersion updated. URLs added."
VR1: library part 3362P-1-103, "10 kOhms 0.5W, 1/2W PC Pins Through Hole Trimmer Potentiometer Cermet 1 Turn Top Adjustment", Package="3116 Bourns", Availability=Unavailable, Check_prices=https://www.snapeda.com/parts/3362P-1-103/Bourns/view-part/1483042/?ref=eda, MF=Bourns, MP=3362P-1-103, Price=None, SnapEDA_Link=https://www.snapeda.com/parts/3362P-1-103/Bourns/view-part/1483042/?ref=snap
Y1: library part ECS-121-S-4X_12.096, "CRYSTAL T/H", Package=None, Availability=Unavailable, MP="ECS-121-S-4X 12.096", Price=None

## Free pads (board coordinates)
  round 4 hole 2.54: 0(3,55) 0(3.081,46.637) 0(7.493,3.429) 0(7.493,21.844) 0(17.517,55) 0(17.598,46.637) 0(21.209,37.084) 0(21.209,75.565) 0(78.359,37.084) 0(78.359,75.565) 0(82.483,55) 0(82.564,46.637) 0(92.5,3.429) 0(92.5,21.844) 0(97,55) 0(97.081,46.637)

## Via types
v1: diameter 1.27, hole 0.711, Top Layer to Bottom Layer, 86 vias

## Nets (pads, with @x,y where several pads share a name; then routed paths per layer and width w, separated by ;. In a path a pad name is that pad's centre, name@x,y a point inside that pad or via, vN(x,y) a via of type N, cw(c..) or ccw(c..) an arc to the next point about the centre after c; other vN are vias at no path point)
+5: C2.2 C3.1 C7.2 C10.1 J1.9 J10.4 P1.2 R2.2 R3.2 R5.2 R6.2 R8.2 R9.2 R11.2 R12.2 R13.2 R14.2 R15.1 R16.1 R17.2 R18.2 R19.1 R20.1 R25.2 U1.3 U2.3 U3.19 U3.20 U4.2 U4.4 U5.4 U5.6 U5.18 U.2@54.197,27.029 VR1.1 | length 307.2
  Top Layer w0.254: VR1.1 22.083,30.099 22.718,30.734 R17.2 ; R20.1 24.993,37.073 24.104,36.184 R19.1 24.104,32.708 ; U2.3 31.102,31.748 30.084,32.766 24.162,32.766 24.104,32.708 ; U3.20 33.972,13.821 33.823,13.97 28.723,13.97 28.574,14.119 C2.2 28.566,15.502 C3.1 28.535,19.685 27.163,19.685 24.485,22.363 R18.2 24.485,29.094 24.115,29.464 R17.2 ; v1(51.943,82.423) 51.964,82.444 51.964,85.125 J1.9 ; J10.4 52.347,28.537 52.69,28.194 54.065,28.194 54.214,28.045 54.214,27.046 54.197,27.029 58.383,27.029 58.532,26.88 58.532,21.442 58.245,21.155 58.035,21.155 58.003,21.187 57.439,21.187 57.04,20.788 57.04,20.719 56.921,20.6 56.921,14.518 56.754,14.351 v1(56.754,13.335) ; 54.446,9.652 54.521,9.727 ; U5.4 54.521,12.1 54.64,12.219 54.64,12.288 55.179,12.827 55.357,12.827 55.865,13.335 v1(56.754,13.335) ; U5.6 56.119,11.333 56.119,12.573 56.754,13.208 v1(56.754,13.335) ; v1(65.517,7.62) 69.454,7.62 69.998,8.164 69.998,14.682 69.686,14.994 P1.2 68.819,15.017 68.819,17.653 70.202,19.036 C7.2 74.153,24.511 74.545,24.903 R15.1 ; U1.3 67.667,37.075 70.216,39.624 73.148,39.624 73.297,39.475 R14.2 73.297,36.797 74.545,35.549 R16.1 ; R15.1@74.418,26.162 R15.1@74.447,26.162 ; R15.1@74.447,26.104 R15.1@74.505,26.162 ; R25.2 74.747,21.971 76.185,21.971 76.649,22.435 C10.1 76.649,26.013 76.5,26.162 R15.1 ; U4.2 80.376,27.375 80.376,30.005 ; U4.4 80.397,32.479 80.376,32.458 80.376,30.005 ; 24.104,32.708 24.104,30.745 R17.2 ; R15.1@74.505,26.162 74.545,26.202 R16.1 ; R15.1@74.505,26.162 R15.1 ; R16.1 80.282,30.099 80.376,30.005
  Top Layer w0.381: U3.20 U3.19 34.628,11.023 34.628,10.095 35.789,8.933 36.137,8.933 v1(36.307,8.763) ; v1(48.245,8.763) 49.261,8.763 50.15,9.652 54.446,9.652 ; 54.521,9.727 U5.4
  Bottom Layer w0.254: R2.2 8.676,73.192 10.541,75.057 11.938,75.057 13.589,76.708 15.356,76.708 R3.2 16.372,76.697 19.177,79.502 23.368,79.502 24.003,80.137 26.024,80.137 R5.2 26.035,79.121 26.416,78.74 32.766,78.74 43.612,89.586 R6.2 47.066,82.572 47.215,82.423 v1(51.943,82.423) 51.943,79.97 52.591,79.322 62.081,79.322 62.23,79.471 R8.2 66.432,82.285 69.353,79.364 R9.2 73.544,79.364 74.052,78.856 R11.2 80.402,78.856 82.169,77.089 82.169,73.682 82.318,73.533 86.868,73.533 91.059,69.342 92.531,69.342 R12.2 ; v1(56.754,13.335) 57.897,13.335 60.31,10.922 62.362,10.922 62.474,10.81 64.526,10.81 64.755,10.581 64.755,9.398 65.517,8.636 v1(65.517,7.62)
  Bottom Layer w0.381: v1(36.307,8.763) v1(48.245,8.763)
A_DIR: U3.22 U5.24 | length 35.5
  Top Layer w0.254: U3.22 32.672,7.515 33.237,7.515 v1(33.386,7.366) v1@33.386,7.375 ; v1(38.481,17.018) 38.481,18.684 41.006,21.209 50.658,21.209 51.039,20.828 51.039,20.276 51.376,19.939 52.013,19.939 U5.24
  Bottom Layer w0.254: v1(33.386,7.366) 34.275,7.366 35.291,8.382 35.291,12.446 34.783,12.954 34.783,14.351 35.672,15.24 36.815,15.24 37.289,15.714 37.289,16.715 37.614,17.04 38.459,17.04 v1(38.481,17.018)
B_DIR: U3.16 U5.26 | length 22.8
  Top Layer w0.254: U3.16 36.572,12.696 37.128,13.252 37.89,13.252 v1(37.973,13.335) ; v1(42.037,13.589) 42.022,13.604 42.022,16.637 45.324,19.939 49.112,19.939 49.261,19.79 49.261,17.73 49.41,17.581 U5.26
  Bottom Layer w0.254: v1(37.973,13.335) 38.1,13.462 41.91,13.462 v1(42.037,13.589)
BAT: C4.2 C5.1 C6.2 U3.13 U3.14 U3.24 U4.3 U.2@41.326,9.763 | length 103.3
  Top Layer w0.254: v1(29.958,8.002) 29.958,8.161 30.687,8.89 31.205,8.89 31.372,9.057 U3.24 ; C5.1 34.772,15.497 C4.2 37.251,15.494 38.989,13.756 38.989,12.914 38.394,12.319 38.323,12.319 37.941,11.937 37.941,11.098 U3.14 ; v1(38.354,7.366) 38.354,7.641 37.872,8.123 U3.14 ; v1(40.625,5.207) 40.625,7.62 41.326,8.321 41.326,9.763 38.966,9.763 38.523,10.206 38.523,11.028 U3.13 U3.14 ; v1(80.249,21.463) 81.011,22.225 81.011,25.364 81.16,25.513 82.57,25.513 82.697,25.64 U4.3 ; C6.2@82.662,25.273 C6.2@82.697,25.308
  Bottom Layer w0.254: v1(29.958,8.002) 31.139,8.002 32.791,6.35 34.275,6.35 35.672,7.747 37.255,7.747 37.441,7.56 38.16,7.56 v1(38.354,7.366) ; v1(40.625,5.207) 40.752,5.334 47.229,5.334 48.245,4.318 48.245,3.302 48.88,2.667 72.607,2.667 72.756,2.816 72.756,14.986 79.233,21.463 v1(80.249,21.463)
CZ1: R20.2 U2.13 U5.30 | length 40.9
  Top Layer w0.254: R20.2 29.683,38.481 29.832,38.332 29.832,37.211 ; U2.13 29.832,37.211 ; v1(31.1,37.211) 29.832,37.211 ; v1(46.482,16.383) 48.096,16.383 48.753,15.726 48.753,14.986 49.358,14.381 U5.30
  Bottom Layer w0.254: v1(31.1,37.211) 31.1,30.749 45.466,16.383 v1(46.482,16.383)
CZ2: R19.2 U2.14 U5.31 | length 39.8
  Top Layer w0.254: R19.2 27.036,34.671 27.419,35.054 U2.14 28.561,35.055 v1(28.56,37.211) v1(28.56,37.211) ; v1(47.498,14.478) 47.596,14.38 48.641,14.38 49.007,14.014 49.007,13.73 49.156,13.581 U5.31
  Bottom Layer w0.254: v1(28.56,37.211) 28.56,32.571 46.631,14.5 47.476,14.5 v1(47.498,14.478)
CZ3: R18.1 U2.2 U5.32 | length 34.2
  Top Layer w0.254: R18.1 28.814,26.797 29.83,27.813 ; U2.2 29.832,28.869 29.83,28.867 29.83,27.813 ; v1(31.1,27.94) 30.973,27.813 29.83,27.813 ; v1(47.625,12.446) 49.149,12.446 49.484,12.781 U5.32
  Bottom Layer w0.254: v1(31.1,27.94) 32.116,27.94 46.594,13.462 46.594,12.595 46.743,12.446 v1(47.625,12.446)
CZ4: R17.1 U2.1 U5.1 | length 36.9
  Top Layer w0.254: R17.1@26.031,30.734 27.036,30.734 27.544,30.226 28.44,30.226 U2.1 28.498,30.04 28.498,28.005 v1(28.433,27.94) ; v1(48.26,10.668) 50.608,10.668 51.271,11.331 U5.1 52.121,10.828 U5.1@51.961,10.668
  Bottom Layer w0.254: v1(28.433,27.94) 28.56,27.813 29.79,27.813 46.935,10.668 v1(48.26,10.668)
CZ5: R16.2 U1.13 U5.2 | length 34.9
  Top Layer w0.254: U5.2 52.921,12.484 52.451,12.954 52.451,14.083 52.6,14.232 54.054,14.232 54.062,14.224 55.208,14.224 55.738,14.754 v1(55.738,17.526) ; v1(68.946,26.797) 68.942,26.802 68.942,29.025 U1.13 68.937,30.331 69.001,30.395 72.449,30.395 R16.2
  Bottom Layer w0.254: v1(55.738,17.526) 55.738,18.393 55.887,18.542 57.302,18.542 60.564,21.804 60.564,21.84 62.6,23.876 66.069,23.876 67.974,25.781 68.797,25.781 68.946,25.93 v1(68.946,26.797)
CZ6: R15.2 U1.14 U5.11 | length 36.6
  Top Layer w0.254: U5.11 60.527,14.381 60.96,13.948 60.96,13.93 61.555,13.335 63.098,13.335 63.591,12.842 v1(63.866,12.842) ; v1(70.724,26.797) 70.724,27.072 70.207,27.589 U1.14 71.413,29.029 72.756,27.686 72.756,26.173 R15.2 R15.2@72.673,26.234
  Bottom Layer w0.254: v1(63.866,12.842) 62.048,12.842 60.325,14.565 60.325,18.403 61.072,19.15 61.072,21.63 62.81,23.368 66.279,23.368 68.184,25.273 70.343,25.273 70.724,25.654 v1(70.724,26.797)
CZ7: R14.1 U1.2 U5.12 | length 40.9
  Top Layer w0.254: U5.12 61.177,15.181 61.326,15.032 61.326,14.5 61.827,14.5 v1(61.976,14.351) ; v1@68.382,31.567 v1(68.311,31.496) 68.311,32.363 68.46,32.512 68.692,32.512 68.937,32.757 U1.2 68.946,33.988 68.946,37.211 69.889,38.154 R14.1
  Bottom Layer w0.254: v1(61.976,14.351) 60.833,15.494 60.833,18.192 61.834,19.193 61.834,21.673 62.894,22.733 66.406,22.733 68.438,24.765 70.641,24.765 71.74,25.864 71.74,29.543 70.93,30.353 68.587,30.353 68.311,30.629 v1(68.311,31.496)
CZ8: R13.1 U1.1 U5.13 | length 37.7
  Top Layer w0.254: U5.13 61.077,15.981 61.31,15.748 62.382,15.748 62.85,15.28 63.699,15.28 v1(63.866,15.113) ; v1(70.216,31.75) 70.212,31.755 70.212,33.974 U1.1 R13.1@72.747,33.979 ; R13.1@72.747,34.106 R13.1@72.872,34.231
  Bottom Layer w0.254: v1(63.866,15.113) 63.591,15.113 63.083,15.621 62.063,15.621 61.341,16.343 61.341,17.982 62.342,18.983 62.342,21.463 63.104,22.225 66.66,22.225 68.692,24.257 70.851,24.257 72.248,25.654 72.248,29.846 71.233,30.861 70.216,30.861 v1(70.216,31.75)
GND: C1.1 C2.1 C3.2 C4.1 C5.2 C6.1 C7.1 C8.2 C9.2 C10.2 C11.2 CZ1.4 CZ2.2 CZ2.4 CZ3.4 CZ4.2 CZ4.4 CZ5.4 CZ6.2 CZ6.4 CZ7.4 CZ8.2 CZ8.4 DS1.2 DS2.2 J1.11 J1.12 J2.01 J10.1 J10.2 P1.6 R21.1 R26.1 U1.12 U2.12 U3.3 U3.4 U3.9 U3.10 U3.18 U4.1 U5.3 U5.5 U5.21 VR1.3 | length 11.7
  Top Layer w0.254: R21.1 45.705,7.417 46.264,6.858 v1(48.768,6.858) ; U5.3 v1(53.721,13.208) ; v1@53.745,18.058 v1(53.594,17.907) 54.483,17.907 54.521,17.945 U5.21 ; U4.1 78.097,24.802 C10.2
  other v1: 40.447,3.353 31.633,21.641 49.286,22.987 57.414,23.317 60.716,24.028 58.039,31.115 54.61,82.55 55.499,93.599
MISO: P1.1 R24.1 U5.16 | length 40
  Top Layer w0.254: R24.1 v1(48.626,28.829) ; v1(57.77,28.829) 60.96,28.829 67.818,21.971 v1(67.818,20.828) ; U5.16 60.784,18.381 61.199,18.796 65.009,18.796 65.517,18.288 v1(67.056,18.288) 67.056,17.272 66.302,16.518 P1.1
  Bottom Layer w0.254: v1(48.626,28.829) v1(57.77,28.829) ; v1(67.056,18.288) 67.139,18.371 67.139,19.133 67.818,19.812 v1(67.818,20.828)
MOSI: P1.4 R23.1 U5.15 | length 44.2
  Top Layer w0.254: R23.1 46.403,25.146 v1(48.626,25.146) ; U5.15 61.737,17.581 61.936,17.78 64.313,17.78 64.575,17.519 v1(64.849,17.519) ; v1(59.548,26.416) 59.675,26.289 61.214,26.289 65.659,21.844 v1(65.659,20.828) ; v1@64.882,17.519 64.882,11.325 65.031,11.176 67.423,11.176 67.572,11.325 67.572,12.305 67.721,12.454 P1.4
  Bottom Layer w0.254: v1(48.626,25.146) 48.631,25.151 48.631,26.013 49.033,26.416 v1(59.548,26.416) ; v1(64.849,17.519) 64.866,17.535 64.866,20.005 65.659,20.798 v1(65.659,20.828)
Net_1: ?.1@20.813,14.859 U3.1 U3.2 | length 20.3
  Top Layer w0.254: U3.1@31.363,3.77 U3.1
  Top Layer w0.381: v1(29.337,3.683) 31.363,3.683 U3.1@31.363,3.77 ; U3.1 U3.2
  Bottom Layer w0.254: ?.1@20.686,14.732 ?.1@20.813,14.859
  Bottom Layer w0.381: ?.1@20.686,14.732 20.686,11.198 20.835,11.049 25.385,11.049 29.167,7.267 29.167,3.853 v1(29.337,3.683)
Net_1: ?.1@78.852,6.985 U3.11 U3.12 | length 48.3
  Top Layer w0.254: U3.12@38.494,3.751 U3.12
  Top Layer w0.381: U3.11 U3.12 ; U3.12@38.494,3.751 38.494,1.765 v1(38.608,1.651)
  Bottom Layer w0.381: v1(38.608,1.651) 38.698,1.561 39.814,1.561 40.105,1.27 74.135,1.27 74.358,1.493 74.358,6.157 74.582,6.381 78.248,6.381 ?.1@78.852,6.985
Net_2: ?.2@20.813,6.985 U3.5 U3.6 | length 21
  Top Layer w0.381: v1(33.946,1.686) 33.967,1.706 33.967,3.773 U3.5 U3.6
  Bottom Layer w0.381: ?.2@20.813,6.985 25.49,6.985 25.639,6.836 25.639,1.909 25.862,1.686 v1(33.946,1.686)
Net_2: ?.2@78.852,14.859 U3.7 U3.8 | length 57.8
  Top Layer w0.381: U3.7 U3.8 35.928,3.773 35.928,1.537 v1(35.941,1.524)
  Bottom Layer w0.381: v1(35.941,1.524) 37.148,2.73 39.543,2.73 40.178,2.095 72.844,2.095 73.596,2.848 73.596,8.89 75.501,10.795 78.707,10.795 78.93,11.018 78.93,14.781 ?.2@78.852,14.859
NetC1_2: C1.2 U1.4 U1.6 U1.8 U1.10 U2.4 U2.6 U2.8 U2.10 VR1.2 | length 83.7
  Top Layer w0.254: v1(26.274,24.13) C1.2 29.322,24.174 29.322,25.886 29.471,26.035 31.989,26.035 33.661,27.707 33.661,28.575 ; U2.10 33.642,32.514 32.372,31.244 U2.4 32.372,28.869 32.666,28.575 33.661,28.575 ; 33.791,33.655 35.926,33.655 36.18,33.909 36.18,35.052 U2.8 36.793,35.054 36.942,34.905 36.942,34.185 37.091,34.036 v1(38.085,34.036) v1@37.958,33.909 ; U2.6 34.912,28.831 34.656,28.575 33.661,28.575 ; v1(38.085,38.735) 63.34,38.735 66.397,35.678 U1.4 66.406,33.97 66.406,32.766 66.248,32.608 65.127,32.608 ; U1.8@62.592,29.025 U1.8 62.587,30.344 62.85,30.607 65.127,30.607 ; U1.6 63.857,32.757 64.006,32.608 65.127,32.608 ; U1.10 65.127,30.607 ; 65.127,30.607 65.127,32.608
  Bottom Layer w0.254: VR1.2 21.844,25.639 23.353,24.13 v1(26.274,24.13) ; v1(38.085,34.036) v1(38.085,38.735)
NetC8_1: C8.1 U5.7 Y1.2 | length 12.3
  Top Layer w0.254: C8.1 52.89,2.703 Y1.2 56.246,6.731 56.921,7.406 U5.7
NetC9_1: C9.1 U5.8 Y1.1 | length 8.8
  Top Layer w0.254: Y1.1@57.516,6.758 Y1.1@57.543,6.731 ; C9.1@57.643,2.833 C9.1 57.77,2.73 Y1.1 57.721,6.78 U5.8
NetC11_1: C11.1 U5.20 | length 4
  Top Layer w0.254: C11.1 55.103,22.098 55.357,21.844 55.357,19.867 U5.20
NetCZ1_1: CZ1.1 R1.1 | length 11.7
  Bottom Layer w0.254: R1.1 3.302,72.782 3.302,74.549 2.769,75.082 2.769,79.506 2.794,79.531 2.794,79.756 3.81,79.756 5.345,81.291 CZ1.1
NetCZ1_2: CZ1.2 CZ2.1 | length 13.3
  Bottom Layer w0.254: CZ1.2 5.345,79.767 7.366,81.788 14.837,81.788 14.986,81.937 14.986,83.46 CZ2.1
NetCZ1_3: CZ1.3 J1.1 R2.1 | length 48.6
  Top Layer w0.254: v1(7.595,77.953) 8.611,77.953 15.805,85.147 J1.1
  Bottom Layer w0.254: CZ1.3 3.545,77.227 5.78,74.992 R2.1 v1(7.595,77.953) v1@7.62,77.978
NetCZ2_3: CZ2.3 J1.2 R3.1 | length 39.7
  Top Layer w0.254: v1(18.923,87.503) 44.196,87.503 44.958,86.741 44.958,85.174 J1.2
  Bottom Layer w0.254: R3.1 15.367,79.756 15.999,80.388 15.999,85.468 16.775,86.244 CZ2.3 16.807,87.503 v1(18.923,87.503)
NetCZ3_1: CZ3.1 R4.1 | length 10
  Bottom Layer w0.254: CZ3.1 28.459,89.8 27.683,89.024 27.683,85.912 29.845,83.75 R4.1
NetCZ3_2: CZ3.2 CZ4.1 | length 15.9
  Bottom Layer w0.254: CZ3.2 28.459,88.149 32.512,92.202 39.856,92.202 40.005,92.351 40.005,93.683 CZ4.1
NetCZ3_3: CZ3.3 J1.3 R5.1 | length 34.1
  Top Layer w0.254: v1(24.384,89.154) 44.323,89.154 45.974,87.503 45.974,85.158 J1.3
  Bottom Layer w0.254: v1(24.384,89.154) 24.384,87.44 24.924,86.9 CZ3.3 26.659,85.714 26.035,85.09 R5.1
NetCZ4_3: CZ4.3 J1.4 R6.1 | length 20.2
  Top Layer w0.254: J1.4 46.99,85.151 46.99,87.503 49.584,90.097 v1(49.584,91.386)
  Bottom Layer w0.254: CZ4.3 38.216,90.921 38.608,91.313 46.993,91.313 R6.1 v1(49.584,91.386) v1@49.657,91.313
NetCZ5_1: CZ5.1 R7.1 | length 14.3
  Bottom Layer w0.254: R7.1 59.911,95.261 60.073,95.099 CZ5.1
NetCZ5_2: CZ5.2 CZ6.1 | length 13.6
  Bottom Layer w0.254: CZ5.2 60.11,89.662 65.772,89.662 65.84,89.594 72.3,89.594 72.517,89.811 CZ6.1
NetCZ5_3: CZ5.3 J1.5 R8.1 | length 24
  Top Layer w0.254: J1.5 47.986,86.763 47.984,86.765 47.984,87.608 51.816,91.44 v1(55.626,91.44)
  Bottom Layer w0.254: v1(55.626,91.44) 57.912,91.44 58.273,91.079 CZ5.3 58.273,88.287 58.422,88.138 59.944,88.138 62.23,85.852 R8.1
NetCZ6_3: CZ6.3 J1.6 R9.1 | length 32.9
  Top Layer w0.254: J1.6 48.986,87.721 51.308,90.043 66.294,90.043 68.453,87.884 v1(68.453,86.868)
  Bottom Layer w0.254: v1(68.453,86.868) 68.516,86.805 CZ6.3 70.717,81.186 R9.1
NetCZ7_1: CZ7.1 R10.1 | length 10.6
  Bottom Layer w0.254: R10.1 84.201,84.709 85.101,85.609 CZ7.1
NetCZ7_2: CZ7.2 CZ8.1 | length 13.1
  Bottom Layer w0.254: CZ7.2 96.107,82.963 96.785,82.285 CZ8.1
NetCZ7_3: CZ7.3 J1.7 R11.1 | length 42
  Top Layer w0.254: J1.7 49.911,85.221 49.911,87.63 50.633,88.352 65.532,88.352 71.525,82.359 v1(73.724,82.359)
  Bottom Layer w0.254: v1@73.66,82.423 v1(73.724,82.359) 73.787,82.296 73.787,80.805 73.936,80.656 R11.1 75.184,81.788 76.359,82.963 CZ7.3
NetCZ8_3: CZ8.3 J1.8 R12.1 | length 57.6
  Top Layer w0.254: J1.8 50.986,87.354 51.135,87.503 59.817,87.503 68.58,78.74 90.17,78.74 91.789,77.121 v1(92.996,77.121)
  Bottom Layer w0.254: R12.1 92.541,73.491 94.985,75.935 CZ8.3 v1(92.996,77.121) v1@92.964,77.089
NetDS1_1: DS1.1 R23.2 | length 1.6
  Top Layer w0.254: DS1.1 R23.2
NetDS2_1: DS2.1 R24.2 | length 1.9
  Top Layer w0.254: DS2.1 R24.2
NetJ2_02: J2.02 U.3@42.276,7.663 | length 4.5
  Top Layer w0.254: U.3@42.276,7.663 42.276,6.35 42.911,5.715 J2.02
NetJ10_5: J10.5 U1.7 | length 15.7
  Top Layer w0.254: J10.5 51.347,34.109 54.093,36.855 61.174,36.855 62.596,35.433 62.596,33.988 U1.7
NetJ10_6: J10.6 U1.5 | length 19.5
  Top Layer w0.254: J10.6 50.347,33.979 54.087,37.719 62.072,37.719 65.127,34.664 U1.5
NetJ10_7: J10.7 U1.9 | length 23.5
  Top Layer w0.254: J10.7 49.371,32.828 49.371,34.901 v1(49.395,34.925) ; U1.9 63.857,27.336 64.559,26.634 v1(64.592,26.634)
  Bottom Layer w0.254: v1(49.395,34.925) 56.119,34.925 64.41,26.634 v1(64.592,26.634)
NetJ10_8: J10.8 U1.11 | length 29
  Top Layer w0.254: J10.8 48.36,32.817 48.36,34.612 48.379,34.631 48.379,36.949 v1(48.387,36.957) ; U1.11 66.402,29.025 66.402,26.548 v1(66.406,26.543)
  Bottom Layer w0.254: v1(48.387,36.957) 55.992,36.957 v1(66.406,26.543)
NetJ10_9: J10.9 U2.7 | length 13.5
  Top Layer w0.254: U2.7 46.695,30.104 47.347,30.756 J10.9
NetJ10_10: J10.10 U2.5 | length 16.2
  Top Layer w0.254: U2.5 33.64,30.106 33.64,31.474 33.789,31.623 41.26,31.623 41.895,30.988 46.318,30.988 46.34,31.01 46.34,31.115 46.347,31.122 J10.10
NetJ10_11: J10.11 U2.9 | length 15.1
  Top Layer w0.254: U2.9 34.91,35.056 34.91,36.271 35.059,36.42 36.552,36.42 36.571,36.401 37.231,36.401 42.136,31.496 45.324,31.496 45.347,31.519 J10.11
NetJ10_12: J10.12 U2.11 | length 17.5
  Top Layer w0.254: U2.11 32.372,36.578 32.751,36.957 43.8,36.957 44.347,36.41 J10.12
NetR21_2: R21.2 U.1@43.226,9.763 | length 2.5
  Top Layer w0.254: U.1@43.226,9.763 45.634,9.763 R21.2
NetR22_1: R22.1 U5.14 | length 22.6
  Top Layer w0.254: R22.1@52.857,23.515 52.559,23.813 R22.1 52.309,22.374 52.458,22.225 v1(53.325,22.225) ; U5.14 59.179,16.773 62.348,16.773 v1(62.357,16.764) ; v1(59.548,22.225) 63.209,22.225 63.358,22.076 v1(63.358,20.828)
  Bottom Layer w0.254: v1(53.325,22.225) v1(59.548,22.225) ; v1(62.357,16.764) 62.44,16.847 63.202,16.847 63.358,17.003 v1(63.358,20.828)
NetR22_2: R22.2 U.1@52.297,27.029 | length 1.6
  Top Layer w0.254: U.1@52.297,27.029 52.297,25.475 R22.2
NetR25_1: R25.1 R26.2 U5.27 | length 39
  Top Layer w0.254: R26.2 48.079,17.311 48.609,16.781 U5.27 50.673,16.779 51.928,16.779 52.451,16.256 v1(52.705,16.256) ; v1(72.248,20.066) 74.62,20.066 R25.1
  Bottom Layer w0.254: v1(52.705,16.256) 55.778,16.256 55.905,16.383 57.789,16.383 62.234,11.938 63.333,11.938 63.445,11.826 65.248,11.826 65.776,11.298 71.84,11.298 72.248,11.706 v1(72.248,20.066)
PWMA: U3.23 U5.9 | length 48.9
  Top Layer w0.254: v1(31.989,5.715) 32.006,5.731 32.006,11.012 U3.23 ; U5.9 59.171,10.436 59.701,9.906 v1(61.595,9.906)
  Bottom Layer w0.254: v1(31.989,5.715) 34.358,5.715 35.781,7.137 37.146,7.137 37.933,6.35 39.09,6.35 39.471,6.731 41.514,6.731 41.895,6.35 47.693,6.35 49.261,4.782 49.261,3.937 49.515,3.683 61.446,3.683 61.595,3.832 v1(61.595,9.906)
PWMB: U3.15 U5.10 | length 48
  Top Layer w0.254: v1(36.332,6.121) 36.332,7.352 37.323,8.342 37.323,9.184 37.222,9.285 U3.15 ; U5.10 60.572,13.581 61.326,12.827 62.342,12.827 63.373,11.796 v1(63.373,4.445)
  Bottom Layer w0.254: v1(36.332,6.121) 37.443,6.121 37.723,5.842 39.301,5.842 39.682,6.223 41.26,6.223 41.641,5.842 47.483,5.842 48.753,4.572 48.753,3.512 49.09,3.175 63.224,3.175 63.373,3.324 v1(63.373,4.445)
RST: P1.5 U5.29 | length 17.9
  Top Layer w0.254: U5.29 50.7,15.211 54.454,15.211 v1(54.483,15.24)
  Bottom Layer w0.254: v1(54.483,15.24) 57.897,15.24 61.707,11.43 63.123,11.43 63.235,11.318 64.752,11.318 66.156,9.914 P1.5
SCK: P1.3 U5.17 | length 18.8
  Top Layer w0.254: U5.17 57.74,19.812 67.527,19.812 68.072,19.267 68.072,15.859 67.686,15.473 67.686,13.875 67.527,13.716 66.451,13.716 66.302,13.567 P1.3
ZAŁ.CZ: J1.10 J10.3 R1.2 R4.2 R7.2 R10.2 U.3@53.247,29.129 | length 125.7
  Top Layer w0.254: v1(6.35,70.993) 7.366,70.993 18.231,81.858 26.551,81.858 26.748,81.661 v1(33.02,81.661) 39.116,81.661 40.513,80.264 52.937,80.264 v1(53.012,80.338) ; J1.10 53.086,85.046 53.086,80.413 v1(53.012,80.338) ; U.3@53.247,29.129 53.347,29.229 J10.3 ; v1(86.981,74.944) 85.591,74.944 82.444,78.091 67.959,78.091 65.786,80.264 53.086,80.264 v1(53.012,80.338)
  Bottom Layer w0.254: R1.2 3.291,70.993 v1(6.35,70.993) ; R4.2 32.625,80.405 32.661,80.369 33.02,80.728 v1(33.02,81.661) ; R7.2 52.556,93.511 52.705,93.362 52.705,93.345 53.012,93.038 v1(53.012,80.338) ; R10.2 v1(86.981,74.944) v1@87.122,74.803
~A_DIR: U3.21 U5.23 | length 32
  Top Layer w0.254: U3.21 33.322,9.898 33.782,9.438 v1(33.782,9.271) ; v1(36.307,17.272) 36.307,18.288 39.885,21.866 51.525,21.866 52.138,21.253 52.772,21.253 52.921,21.104 U5.23
  Bottom Layer w0.254: v1(33.782,9.271) 33.767,9.286 33.767,14.224 35.672,16.129 36.158,16.129 36.307,16.278 v1(36.307,17.272)
~B_DIR: U3.17 U5.25 | length 23.6
  Top Layer w0.254: U3.17 35.922,13.585 v1(35.926,13.589) ; v1(40.005,15.113) 40.005,17.033 43.546,20.574 50.023,20.574 50.671,19.926 U5.25
  Bottom Layer w0.254: v1(35.926,13.589) 35.926,14.456 36.075,14.605 38.444,14.605 38.952,15.113 v1(40.005,15.113)
pads on no net: J1.MP1 J1.MP2 J10.MP1 J10.MP2 R?.1 R?.2 U5.19 U5.22 U5.28

## Polygon pours and split planes (outlines as drawn)
GND on Bottom Layer "GND_L02_P001" (solid, pour order 1): 4.572,0.254 4.572,25.273 14.859,25.273 14.872,25.286 14.872,35.254 20.893,41.275 47.498,41.275 47.625,41.402 47.625,44.069 47.534,44.137 3.081,44.137 cw(c3.081,46.637) 3.081,49.137 47.613,49.137 47.625,49.149 47.625,52.451 47.576,52.5 3,52.5 cw(c3,55) 3,57.5 47.467,57.5 47.625,57.658 47.625,77.47 47.624,77.514 ccw(c49.486,-2.417) 11.518,67.945 0.285,67.945 0.285,84.147 cw(c49.486,-2.417) 99.79,83.511 99.79,67.92 87.538,67.92 ccw(c49.486,-2.417) 56.548,77.24 56.546,77.215 56.546,57.5 97,57.5 cw(c97,55) 97,52.5 56.564,52.5 56.515,52.451 56.515,49.149 56.527,49.137 97.081,49.137 cw(c97.081,46.637) 97.081,44.137 56.583,44.137 56.515,44.069 56.515,41.402 56.642,41.275 78.851,41.275 84.872,35.254 84.872,25.309 84.908,25.273 84.89,25.291 95.613,25.291 95.631,25.273 95.631,0.254
GND on Top Layer "GND_L01_P000" (solid, pour order 0): 4.572,0.254 4.572,25.273 14.859,25.273 14.872,25.286 14.872,35.254 20.893,41.275 47.498,41.275 47.625,41.402 47.625,44.069 47.534,44.137 3.081,44.137 cw(c3.081,46.637) 3.081,49.137 47.613,49.137 47.625,49.149 47.625,52.451 47.576,52.5 3,52.5 cw(c3,55) 3,57.5 47.467,57.5 47.625,57.658 47.625,77.47 47.624,77.514 ccw(c49.486,-2.417) 11.518,67.945 0.285,67.945 0.285,84.147 cw(c49.486,-2.417) 99.79,83.511 99.79,67.92 87.538,67.92 ccw(c49.486,-2.417) 56.548,77.24 56.546,77.215 56.546,57.5 97,57.5 cw(c97,55) 97,52.5 56.564,52.5 56.515,52.451 56.515,49.149 56.527,49.137 97.081,49.137 cw(c97.081,46.637) 97.081,44.137 56.583,44.137 56.515,44.069 56.515,41.402 56.642,41.275 78.851,41.275 84.872,35.254 84.872,25.309 84.908,25.273 84.89,25.291 95.613,25.291 95.631,25.273 95.631,0.254

## Keep-outs
Keep-Out Layer:
  lines w0.254: 47.534,44.137 3.081,44.137 cw(c3.081,46.637) 3.081,49.137 47.613,49.137 ; 47.576,52.5 3,52.5 cw(c3,55) 3,57.5 47.467,57.5 47.625,57.658 47.625,77.47 ; 47.624,77.514 ccw(c49.486,-2.417) 11.518,67.945 0.285,67.945 0.285,84.147 cw(c49.486,-2.417) 99.79,83.511 99.79,67.92 87.538,67.92 ccw(c49.486,-2.417) 56.548,77.24 ; 47.625,44.069 47.625,41.402 47.498,41.275 20.893,41.275 14.872,35.254 14.872,25.286 14.859,25.273 4.572,25.273 4.572,0.254 14.872,0.254 84.872,0.254 95.631,0.254 95.631,25.273 95.613,25.291 84.89,25.291 ; 47.625,49.149 47.625,52.451 ; 56.517,77.243 56.546,77.215 56.546,57.5 97,57.5 cw(c97,55) 97,52.5 56.564,52.5 56.515,52.451 56.515,49.149 56.527,49.137 97.081,49.137 cw(c97.081,46.637) 97.081,44.137 56.583,44.137 56.515,44.069 56.515,41.402 56.642,41.275 78.851,41.275 84.872,35.254 84.872,25.309 84.908,25.273

## Text inside footprints (layer, text, board x,y; h text height)
?: Top Overlay "Motor" at 24.061,18.142 h3 r270
?: Top Overlay "Motor" at 72.937,3.721 h3 r90